# EAGLE board routed (EAGLE 7.7.0)
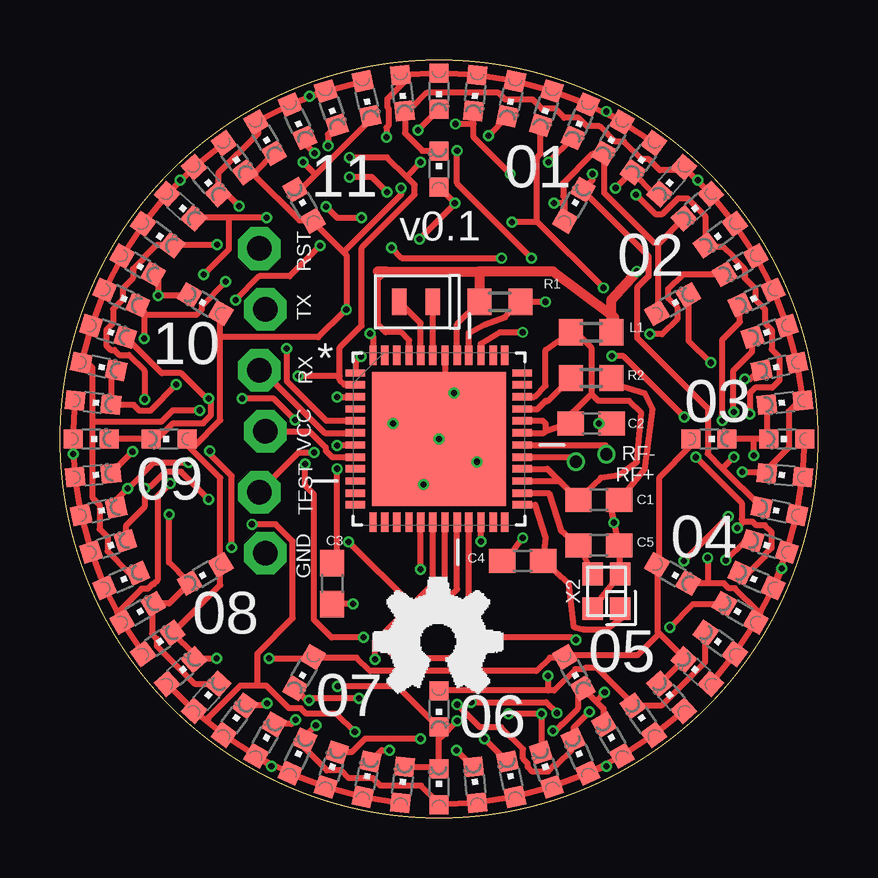
[diagram p0: board, top side]
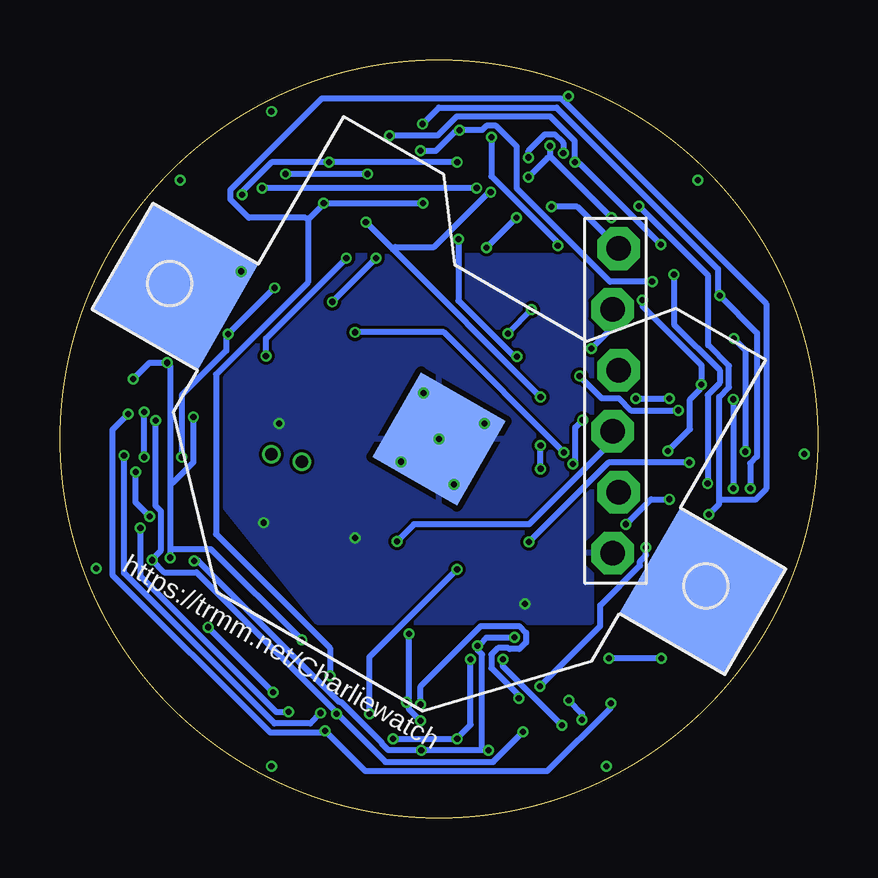
[diagram p1: board, bottom side, seen from below]

Size 31.6 x 31.6 mm. Coordinates in mm from the lower left corner, seen from the top.
Outline: circle at 15.8,15.8 radius 15.8
Copper layers (1*16): Top 0.035mm / dielectric 1.5mm / Bottom 0.035mm
Design rules "default *": minimum track width 10mil, minimum drill 10mil, track to track 5mil, track to pad 5mil, pad to pad 5mil, via to via 5mil, smd to smd 5mil, copper to edge 40mil, drill to drill 8mil, minimum pad ring 10mil, minimum via ring 4mil, stop-mask expansion 4mil, vias tented up to drill 15mil, thermal gap 10mil
Net classes: 0 default: width 0.102 mm, drill 0.025 mm, clearance 0.025 mm

## Footprints (pad centres in the part's own frame; a part is rotated, then mirrored left to right if it is on the bottom)
C0603 = smd 1.1 x 1: 1 -0.85,0; 2 0.85,0
1X06-BIGLOCK = drill 1.016 pad 1.778 octagon: 1 -6.35,0.127; 2 -3.81,-0.127; 3 -1.27,0.127; 4 1.27,-0.127; 5 3.81,0.127; 6 6.35,-0.127
R0603 = smd 1 x 1.1: 1 -0.85,0; 2 0.85,0
CHIPLED_0603 = smd 0.8 x 0.8: A 0,-0.75; C 0,0.75
QFN50P700X700X100-49N = smd 0.813 x 0.305: 1 -3.48,2.743; 2 -3.48,2.261; 3 -3.48,1.753; 4 -3.48,1.245; 5 -3.48,0.762; 6 -3.48,0.254; 7 -3.48,-0.254; 8 -3.48,-0.762; 9 -3.48,-1.245; 10 -3.48,-1.753; 11 -3.48,-2.261; 12 -3.48,-2.743; 25 3.48,-2.743; 26 3.48,-2.261; 27 3.48,-1.753; 28 3.48,-1.245; 29 3.48,-0.762; 30 3.48,-0.254; 31 3.48,0.254; 32 3.48,0.762; 33 3.48,1.245; 34 3.48,1.753; 35 3.48,2.261; 36 3.48,2.743 | smd 0.305 x 0.813: 13 -2.743,-3.48; 14 -2.261,-3.48; 15 -1.753,-3.48; 16 -1.245,-3.48; 17 -0.762,-3.48; 18 -0.254,-3.48; 19 0.254,-3.48; 20 0.762,-3.48; 21 1.245,-3.48; 22 1.753,-3.48; 23 2.261,-3.48; 24 2.743,-3.48; 37 2.743,3.48; 38 2.261,3.48; 39 1.753,3.48; 40 1.245,3.48; 41 0.762,3.48; 42 0.254,3.48; 43 -0.254,3.48; 44 -0.762,3.48; 45 -1.245,3.48; 46 -1.753,3.48; 47 -2.261,3.48; 48 -2.743,3.48 | smd 5.588 x 5.588: 49 0,0
CR2032-SMD = smd 5.08 x 5.08: +$1 -12.7,0; +$2 12.7,0 | smd 4.064 x 4.064: - 0,0
2.0X1.2-2PAD = smd 0.6 x 1.1: 1 -0.7,0; 2 0.7,0
FA-128 = smd 0.95 x 0.85: 1 -0.725,-0.575; 2 0.725,-0.575; 3 0.725,0.575; 4 -0.725,0.575

## Placement (x,y rotation side)
C1  [C0603]  22.47,13.26 0 top
C2  [C0603]  22.15,16.43 0 top
C3  [C0603]  11.35,9.77 270 top
C4  19pf  [C0603]  19.29,10.72 180 top
C5  19pf  [C0603]  22.47,11.35 0 top
JP1  [1X06-BIGLOCK]  8.43,17.39 90 bottom
L1  [R0603]  22.15,20.24 0 top
LED0  [CHIPLED_0603]  14.28,30.22 186 top
LED1  [CHIPLED_0603]  15.8,30.3 180 top
LED2  [CHIPLED_0603]  17.32,30.22 174 top
LED3  [CHIPLED_0603]  18.81,29.98 168 top
LED4  [CHIPLED_0603]  20.28,29.59 162 top
LED5  [CHIPLED_0603]  21.7,29.04 156 top
LED6  [CHIPLED_0603]  23.05,28.36 150 top
LED7  [CHIPLED_0603]  24.32,27.53 144 top
LED8  [CHIPLED_0603]  30.22,17.32 96 top
LED9  [CHIPLED_0603]  29.98,18.81 102 top
LED10  [CHIPLED_0603]  29.59,20.28 108 top
LED11  [CHIPLED_0603]  29.04,21.7 114 top
LED12  [CHIPLED_0603]  28.36,23.05 120 top
LED13  [CHIPLED_0603]  27.53,24.32 126 top
LED14  [CHIPLED_0603]  26.57,25.5 132 top
LED15  [CHIPLED_0603]  25.5,26.57 138 top
LED16  [CHIPLED_0603]  30.3,15.8 90 top
LED17  [CHIPLED_0603]  30.22,14.28 84 top
LED18  [CHIPLED_0603]  29.98,12.78 78 top
LED19  [CHIPLED_0603]  29.59,11.32 72 top
LED20  [CHIPLED_0603]  29.04,9.9 66 top
LED21  [CHIPLED_0603]  28.36,8.55 60 top
LED22  [CHIPLED_0603]  27.53,7.28 54 top
LED23  [CHIPLED_0603]  26.57,6.1 48 top
LED24  [CHIPLED_0603]  15.8,1.3 0 top
LED25  [CHIPLED_0603]  17.32,1.38 6 top
LED26  [CHIPLED_0603]  18.81,1.62 12 top
LED27  [CHIPLED_0603]  20.28,2.01 18 top
LED28  [CHIPLED_0603]  21.7,2.55 24 top
LED29  [CHIPLED_0603]  23.05,3.24 30 top
LED30  [CHIPLED_0603]  24.32,4.07 36 top
LED31  [CHIPLED_0603]  25.5,5.02 42 top
LED32  [CHIPLED_0603]  14.28,1.38 354 top
LED33  [CHIPLED_0603]  12.78,1.62 348 top
LED34  [CHIPLED_0603]  11.32,2.01 342 top
LED35  [CHIPLED_0603]  9.9,2.55 336 top
LED36  [CHIPLED_0603]  8.55,3.24 330 top
LED37  [CHIPLED_0603]  7.28,4.07 324 top
LED38  [CHIPLED_0603]  6.1,5.02 318 top
LED39  [CHIPLED_0603]  5.02,6.1 312 top
LED40  [CHIPLED_0603]  1.38,17.32 264 top
LED41  [CHIPLED_0603]  1.3,15.8 270 top
LED42  [CHIPLED_0603]  1.38,14.28 276 top
LED43  [CHIPLED_0603]  1.62,12.78 282 top
LED44  [CHIPLED_0603]  2.01,11.32 288 top
LED45  [CHIPLED_0603]  2.55,9.9 294 top
LED46  [CHIPLED_0603]  3.24,8.55 300 top
LED47  [CHIPLED_0603]  4.07,7.28 306 top
LED48  [CHIPLED_0603]  1.62,18.81 258 top
LED49  [CHIPLED_0603]  2.01,20.28 252 top
LED50  [CHIPLED_0603]  2.55,21.7 246 top
LED51  [CHIPLED_0603]  3.24,23.05 240 top
LED52  [CHIPLED_0603]  4.07,24.32 234 top
LED53  [CHIPLED_0603]  5.02,25.5 228 top
LED54  [CHIPLED_0603]  6.1,26.57 222 top
LED55  [CHIPLED_0603]  7.28,27.53 216 top
LED56  [CHIPLED_0603]  15.8,4.55 180 top
LED57  [CHIPLED_0603]  15.8,27.05 0 top
LED58  [CHIPLED_0603]  25.54,21.42 300 top
LED59  [CHIPLED_0603]  21.42,25.54 330 top
LED60  [CHIPLED_0603]  12.78,29.98 192 top
LED61  [CHIPLED_0603]  11.32,29.59 198 top
LED62  [CHIPLED_0603]  9.9,29.04 204 top
LED63  [CHIPLED_0603]  8.55,28.36 210 top
LED64  [CHIPLED_0603]  27.05,15.8 270 top
LED65  [CHIPLED_0603]  4.55,15.8 90 top
LED66  [CHIPLED_0603]  25.54,10.17 240 top
LED67  [CHIPLED_0603]  6.06,21.42 60 top
LED68  [CHIPLED_0603]  10.17,25.54 30 top
LED69  [CHIPLED_0603]  10.17,6.06 150 top
LED70  [CHIPLED_0603]  21.42,6.06 210 top
LED71  [CHIPLED_0603]  6.06,10.17 120 top
R1  75k  [R0603]  18.34,21.51 180 top
R2  56k  [R0603]  22.15,18.34 180 top
U2  CC430F5137IRGZR  [QFN50P700X700X100-49N]  15.8,15.8 0 top
U$1  [CR2032-SMD]  15.8,15.8 330 bottom
X1  CRYSTALS-NOGND-IQXC-25  [2.0X1.2-2PAD]  14.85,21.51 180 top
X2  FA-128  [FA-128]  22.78,9.45 90 top

## Library data of the parts
C1-C5 = resistor
JP1 U$1 = adafruit
L1 R1 R2 = rcl
LED0 LED1-LED71 = led
U2 = Texas Instruments_By_element14_Batch_1; MPN: CC430F5137IRGZR; OC_FARNELL: -; OC_NEWARK: 68R5912; PACKAGE: QFN-48; SUPPLIER: TEXAS INSTRUMENTS
X1 = IQD-Frequency-Products
X2 = crystals

## Nets
AVCC: C1.1 C2.1 L1.1 U2.27 U2.28 U2.31 U2.32 U2.34
B0: LED0.A LED1.A LED2.A LED3.A LED4.A LED5.A LED6.A LED7.A LED8.C LED16.C LED24.C LED32.C LED40.C LED48.C LED56.C LED64.C U2.21
B1: LED0.C LED8.A LED9.A LED10.A LED11.A LED12.A LED13.A LED14.A LED15.A LED17.C LED25.C LED33.C LED41.C LED49.C LED57.C LED65.C U2.20
B2: LED1.C LED9.C LED16.A LED17.A LED18.A LED19.A LED20.A LED21.A LED22.A LED23.A LED26.C LED34.C LED42.C LED50.C LED58.C LED66.C U2.19
B3: LED2.C LED10.C LED18.C LED24.A LED25.A LED26.A LED27.A LED28.A LED29.A LED30.A LED31.A LED35.C LED43.C LED51.C LED59.C LED67.C U2.18
B4: LED3.C LED11.C LED19.C LED27.C LED32.A LED33.A LED34.A LED35.A LED36.A LED37.A LED38.A LED39.A LED44.C LED52.C LED60.C LED68.C U2.17
B5: LED4.C LED12.C LED20.C LED28.C LED36.C LED40.A LED41.A LED42.A LED43.A LED44.A LED45.A LED46.A LED47.A LED53.C LED61.C LED69.C U2.3
B6: LED5.C LED13.C LED21.C LED29.C LED37.C LED45.C LED48.A LED49.A LED50.A LED51.A LED52.A LED53.A LED54.A LED55.A LED62.C LED70.C U2.2
B7: LED6.C LED14.C LED22.C LED30.C LED38.C LED46.C LED54.C LED56.A LED57.A LED58.A LED59.A LED60.A LED61.A LED62.A LED63.A LED71.C U2.1
B8: LED7.C LED15.C LED23.C LED31.C LED39.C LED47.C LED55.C LED63.C LED64.A LED65.A LED66.A LED67.A LED68.A LED69.A LED70.A LED71.A U2.48
BSL_RST: JP1.6 R1.1 U2.40
BSL_RX: JP1.4 U2.6
BSL_TEST: JP1.2 U2.39
BSL_TX: JP1.5 U2.5
BSL_VCC: JP1.3 U2.8 U2.22
GND: C1.2 C2.2 C3.2 C4.2 C5.2 JP1.1 R2.1 U2.42 U2.49 U$1.- X2.2 X2.4
P2.4: U2.47
P3.5: U2.16
P3.6: U2.15
P3.7: U2.14
R_BIAS: R2.2 U2.33
RF_N: U2.30
RF_P: U2.29
RF_XIN: C4.1 U2.25 X2.1
RF_XOUT: C5.1 U2.26 X2.3
VCC: L1.2 R1.2 U2.41 U2.45 U$1.+$1
VCORE: C3.1 U2.7
XIN: U2.44 X1.2
XOUT: U2.43 X1.1

## Tracks (layer width: path | path; a pad name or v marks a point on that pad's centre or on a via)
AVCC
  Top 0.254: U2.32 20.12,16.56 20.24,16.43 20.24,16.12 | U2.31 20.18,16.05 20.24,16.12 | U2.34 19.77,17.55 20.24,18.02 20.24,19.51 L1.1 21.51,20.24 22.15,19.61 22.15,17.68 | C2.1 20.74,16.26 | 20.74,16.26 20.24,16.12 | 22.15,17.68 20.74,16.26 | 22.15,17.68 22.44,17.39 23.74,17.39 24.23,16.89 24.05,14.85 23.28,14.27 22.54,14.17 21.59,13.28 C1.1 20.83,14.05 | U2.27 20.83,14.05 | U2.28 20.32,14.55 20.83,14.05
B0  (via drill 0.25)
  Top 0.254: LED7.A LED6.A | LED6.A LED5.A LED4.A LED3.A LED2.A LED1.A LED0.A 14.53,30.86 13.64,29.97 13.64,29.64 13.69,29.59 13.69,28.85 13.61,28.78 v13.61,28.37 | 17.07,12.29 U2.21 v17.04,7.67 | v22.78,29.45 LED6.A | LED48.C 2.34,18.64 2.13,18.44 LED40.C 2.26,17.22 3.07,17.22 3.33,16.97 3.76,16.97 v4.85,18.06 | v7.31,21.59 8.31,22.58 9.58,22.58 v10.85,23.85 | 28.93,15.8 LED16.C 29.49,15.9 29.49,17.22 LED8.C | 28.93,15.8 LED64.C | LED32.C 14.38,2.11 15.75,2.11 LED24.C 15.8,3.38 | 15.8,3.38 LED56.C 15.7,3.86 14.07,5.49 v11.58,5.49 | v16.56,4.04 15.9,3.38 15.8,3.38 | v28.93,15.11 28.93,15.8 | v20.73,4.37 20.27,4.83 v17.14,4.83 | v6.25,15.29 6.25,15.16 7.16,14.25 v7.16,11.28
  Bottom 0.254: v7.31,21.59 7.31,21.34 4.85,18.87 v4.85,18.06 4.93,17.96 4.93,17.86 5.33,17.45 5.33,16.2 v6.25,15.29 | v10.85,23.85 10.85,23.98 13.61,26.75 v13.61,28.37 | 17.04,4.83 17.04,4.52 v16.56,4.04 | 17.04,4.83 v17.04,7.67 | v28.93,15.11 28.93,10.21 22.66,3.94 21.16,3.94 v20.73,4.37 | v17.14,4.83 17.04,4.83 | v7.16,11.28 7.16,10.95 7.42,10.69 7.42,10.52 9.07,8.86 9.07,8 v11.58,5.49
B1  (via drill 0.25)
  Top 0.254: LED14.A LED13.A LED12.A LED11.A LED10.A LED9.A LED8.A 30.84,17.4 30.38,16.94 30.38,15.44 29.49,14.55 29.49,14.38 LED17.C 29.36,14.43 v28.45,14.43 | LED14.A LED15.A 25.96,27 25.02,27 24.56,27.46 24.26,27.46 23.52,28.19 23.14,28.19 22.5,28.83 21.97,28.83 21.62,29.18 21.03,29.18 20.65,29.57 20.09,29.57 19.71,29.95 18.57,29.95 18.29,30.23 15.29,30.23 14.6,29.54 14.48,29.54 LED0.C 14.38,29.46 14.38,28.55 15.11,27.81 15.8,27.81 LED57.C | v26.59,26.59 LED14.A | LED41.C LED65.C 3.91,15.85 4.11,15.85 4.72,16.46 5.97,16.46 6.3,16.79 6.3,17.3 6.16,17.44 | 6.16,17.44 5.05,18.54 4.24,18.54 2.74,20.04 LED49.C | v16.54,2.82 17.22,2.13 LED25.C | v13.74,2.82 13.41,2.82 12.95,2.36 LED33.C | U2.20 16.56,9.52 v14.2,7.16 | v7.59,17.47 8.92,17.47 v9.8,16.59 | v10.21,14.76 10.21,13.87 10.59,13.49 10.59,8.25 11.33,7.52 v12.65,7.52 | v6.2,17.47 6.16,17.44 | v26.01,10.72 v27.86,12.57
  Bottom 0.254: v13.74,2.82 14,2.82 | 14,2.82 v16.54,2.82 17.91,2.82 18.19,3.1 18.19,3.15 19.86,4.83 19.94,4.83 25.83,10.72 v26.01,10.72 | 14,2.82 14,6.81 14.2,7.01 v14.2,7.16 14.1,7.24 13.82,7.52 v12.65,7.52 | v7.59,17.47 v6.2,17.47 | v9.8,16.59 10.11,16.28 10.11,14.86 v10.21,14.76 | v28.45,14.43 28.45,13.16 v27.86,12.57
B2  (via drill 0.25)
  Top 0.254: LED23.A LED22.A LED21.A 29.2,8.56 | 29.2,8.56 LED20.A | LED20.A LED19.A LED18.A 30.85,13.51 LED17.A LED16.A | v30.09,10.4 LED20.A | v3.02,15.27 2.13,14.38 LED42.C | 3.5,20.98 3.5,21.13 3.25,21.39 LED50.C | 3.5,20.98 v3.5,19.99 | v14.93,28.68 LED1.C | v6.91,22.35 5.92,21.36 5.92,21.21 5.69,20.98 3.5,20.98 | 27,9.78 27.69,9.78 27.89,9.58 28.14,9.58 29.11,8.61 29.2,8.56 | 27,9.78 26.21,9.78 LED66.C | v27.13,18.97 26.21,19.89 26.21,21.79 LED58.C | v28.55,18.29 28.78,18.29 29.13,18.64 29.24,18.64 LED9.C | v27,10.85 27,9.78 | v15.04,3.3 12.73,3.3 12.17,2.74 11.56,2.74 LED34.C | v17.7,3.3 18.64,2.36 LED26.C | U2.19 16.05,9.7 13.72,7.37 13.72,6.96 14.07,6.6 v14.48,6.6 14.58,6.68 16.74,6.68 17.6,7.54 21.31,7.54 21.44,7.42 v21.51,7.42 | v16.56,27.81 16.56,26.44 v19.66,23.34 | v23.01,19.25 23.49,19.25 v26.03,16.71
  Bottom 0.254: v3.02,15.27 3.02,19.51 v3.5,19.99 | v6.91,22.35 8.66,22.35 12.55,26.24 12.55,27.99 13.41,28.85 13.82,28.85 14,28.68 v14.93,28.68 15.04,28.6 15.14,28.6 15.93,27.81 v16.56,27.81 | v28.55,18.29 27.86,18.97 v27.13,18.97 27.05,18.87 27,18.82 27,13.97 | 27,13.97 27,11.2 | 27,11.2 v27,10.85 | v17.7,3.3 v15.04,3.3 14.96,3.4 14.48,3.89 v14.48,6.6 | 27,11.2 25.3,11.2 v21.51,7.42 | v19.66,23.34 23.01,19.99 v23.01,19.25 | v26.03,16.71 26.03,14.83 26.9,13.97 27,13.97
B3  (via drill 0.25)
  Top 0.254: LED28.A LED27.A LED26.A LED25.A LED24.A 15.75,0.66 15.06,1.35 13.36,1.35 13.06,1.65 12.04,1.65 11.71,1.98 11.12,1.98 10.21,2.9 10.21,3.23 LED35.C 10.16,3.35 v10.67,3.86 | LED31.A LED30.A LED29.A LED28.A | v22.78,2.15 LED28.A | U2.18 15.54,9.75 14.67,8.88 | 14.67,8.88 13.13,7.34 v13.13,6.6 | LED43.C 2.36,12.95 2.36,13.28 v2.82,13.74 2.92,13.82 3.91,14.81 v5.36,14.81 | LED51.C 3.91,22.66 4.09,22.48 v4.09,21.77 4.19,21.79 5.38,21.79 LED67.C | 17.25,28.93 17.25,28.37 v18.77,26.85 | 17.25,28.93 LED2.C | v22.2,26.85 22.2,26.59 21.82,26.21 LED59.C 21.87,26.09 24.54,23.42 24.54,22.58 24.05,22.1 24.05,20.01 27,17.07 27,15.19 27.62,14.57 | 27.62,14.57 29.24,12.95 LED18.C | v28.09,16.92 28.07,16.94 28.07,18.64 28.85,19.43 28.85,20.04 LED10.C | 27.62,14.57 v28.09,15.04 | 17.25,28.93 v16.48,28.93 | v12.04,11.51 14.67,8.88
  Bottom 0.254: v13.13,6.6 13.13,6.32 v10.67,3.86 | v2.82,13.74 2.82,14.78 2.54,15.06 2.54,20.22 v4.09,21.77 4.17,21.87 4.17,22.89 10.9,29.62 15.8,29.62 v16.48,28.93 | v22.2,26.85 v18.77,26.85 | v28.09,15.04 v28.09,16.92 | v12.04,11.51 8.74,14.81 v5.36,14.81
B4  (via drill 0.25)
  Top 0.254: 6.12,4.04 LED38.A LED39.A | 6.12,4.04 LED37.A LED36.A | LED36.A LED35.A LED34.A LED33.A LED32.A | LED36.A v8.81,2.15 | 10.65,26.81 12.93,29.08 12.93,29.24 LED60.C | 10.65,26.81 10.06,26.21 9.8,26.21 LED68.C | v17.86,28.45 18.64,29.24 LED3.C | 10.65,26.81 v10.13,27.33 | v3.53,17.45 3.53,18.64 2.87,19.3 2.46,19.3 2.26,19.51 2.11,19.51 1.93,19.68 1.93,20.35 2.21,20.62 2.21,21.21 2.62,21.62 2.62,22.07 3.05,22.5 3.05,22.89 3.53,23.37 3.53,23.39 4.01,23.88 LED52.C 4.8,23.9 v6.55,23.9 | LED44.C 2.74,11.56 2.74,12.17 3.53,12.95 v3.53,13.74 3.63,13.82 3.78,13.82 4.39,14.43 5.05,14.43 v6.2,13.28 | v27.76,10.74 28.55,11.53 28.85,11.53 LED19.C | LED27.C 20.07,2.74 v20.07,4.34 v18.69,4.34 | v27.61,16.56 27.61,19.94 28.35,20.68 28.35,21.39 LED11.C | v15.04,10.36 U2.17 | 8.23,5.51 8.61,5.51 9.55,4.57 10.03,4.57 10.26,4.34 11.53,4.34 v12.29,3.58 | 8.23,5.51 7.52,5.51 6.2,4.19 6.2,4.14 6.12,4.04 | v8,12.24 8.99,12.24 9.7,11.53 9.7,8.33 8.23,6.86 8.23,5.51
  Bottom 0.254: v17.86,28.45 15.85,28.45 15.06,29.24 11.15,29.24 10.13,28.22 v10.13,27.33 10.03,27.25 9.91,27.25 v6.55,23.9 | v3.53,17.45 v3.53,13.74 | v27.61,16.56 27.61,13 27.38,12.78 27.38,11.15 27.69,10.85 v27.76,10.74 27.25,10.24 25.91,10.24 20.07,4.39 v20.07,4.34 19.96,4.27 18.03,2.34 13.54,2.34 v12.29,3.58 | v15.04,10.36 18.69,6.71 v18.69,4.34 | v6.2,13.28 6.96,13.28 v8,12.24
B5  (via drill 0.25)
  Top 0.254: LED41.A LED42.A LED43.A LED44.A LED45.A 2.38,8.58 | LED41.A LED40.A | 2.38,8.58 LED46.A LED47.A | LED41.A v0.56,15.16 | v9.83,4.09 9.65,3.91 8.94,3.91 LED36.C | LED69.C 9.8,5.38 10.29,4.9 v10.39,4.9 10.49,4.98 v12.47,4.98 | v22.07,4.42 21.41,3.76 21.41,3.25 LED28.C 21.34,3.12 21.34,2.84 20.7,2.21 20.62,2.21 20.35,1.93 19.68,1.93 19.51,2.11 19.51,2.26 19.3,2.46 19.3,2.87 18.39,3.78 17.5,3.78 v16.56,4.72 | 28.5,12.34 v28.24,12.09 | 28.5,12.34 28.88,12.34 29.03,12.19 29.39,12.19 29.67,11.91 29.67,11.25 29.39,10.97 29.39,10.9 28.7,10.21 28.37,10.21 LED20.C | v8.61,25.02 7.04,25.02 | 7.04,25.02 5.59,25.02 LED53.C | v11.18,28.02 11.18,28.5 11.53,28.85 LED61.C | 19.89,24.87 19.89,27.53 20.04,27.69 20.04,28.85 LED4.C | v22.66,22.1 19.89,24.87 | v24.59,20.17 25.09,20.17 25.73,20.8 25.73,21.28 25.35,21.67 25.35,22.05 25.96,22.66 27.69,22.66 LED12.C | v11.56,17.55 U2.3 | v18.85,24.84 19.79,24.84 19.89,24.87 | v12.06,26.72 13,26.72 v13.64,26.09 | v4.6,13.94 4.06,13.41 4.06,9.91 3.91,9.75 3.86,9.75 3.66,9.55 3.4,9.55 2.49,8.64 2.38,8.58 | v5.99,22.66 7.04,23.7 7.04,25.02 | v26.52,15.04 28.42,13.13 28.42,12.45 28.5,12.34
  Bottom 0.254: v9.83,4.09 9.83,4.34 v10.39,4.9 | v22.07,4.42 22.58,4.42 28.24,10.08 v28.24,12.09 | v12.47,4.98 12.47,5.11 13.61,6.25 13.61,6.81 13.33,7.09 12.9,7.09 12.85,7.04 12.45,7.04 12.17,7.31 12.17,7.72 12.45,8 14.05,8 16.56,5.49 v16.56,4.72 | 11.18,27.58 v8.61,25.02 | v11.18,28.02 11.18,27.58 | v22.66,22.1 v24.59,20.17 24.66,20.07 24.66,19.48 26.52,17.63 v26.52,15.04 | v18.85,24.84 17.72,23.71 | 17.72,23.71 v11.56,17.55 | v12.06,26.72 11.28,27.51 11.18,27.58 | v13.64,26.09 13.72,26.09 16,23.8 17.63,23.8 17.72,23.71 | v4.6,13.94 4.6,17.63 4.09,18.14 4.09,18.67 5.99,20.57 v5.99,22.66
B6  (via drill 0.25)
  Top 0.254: LED55.A LED54.A | LED54.A LED53.A LED52.A LED51.A LED50.A LED49.A LED48.A 1.04,19.08 1.35,18.77 1.35,16.51 | LED54.A v5,26.59 | v8.64,4.77 8.56,4.7 7.72,4.7 LED37.C | v20.55,3.63 20.65,3.63 20.9,3.89 20.93,3.89 21.59,4.55 21.59,5.18 21.79,5.38 LED70.C 21.89,5.31 22.34,4.86 | 22.34,4.86 22.66,4.55 22.66,3.91 LED29.C | v25.43,7.95 26.39,8.92 27.69,8.92 LED21.C | 22.34,4.86 v22.71,5.23 | 1.35,16.51 1.35,13.36 1.65,13.06 1.65,12.04 1.98,11.71 1.98,11.12 2.9,10.21 3.23,10.21 LED45.C | v10.62,27.71 10.21,28.12 10.21,28.35 LED62.C | v12.06,27.53 13.64,27.53 14.44,26.73 | 14.44,26.73 14.78,26.39 14.78,25.98 12.57,23.77 12.57,20.52 11.66,19.61 11.66,18.41 | 11.66,18.41 11.66,18.26 11.86,18.06 U2.2 | v20.37,27.33 21.39,28.35 LED5.C | 14.44,26.73 v15.04,27.33 | v24,25.98 24.82,25.17 25.12,25.17 25.78,25.83 26.16,25.83 26.9,25.09 26.9,23.9 LED13.C 27.03,23.82 27.63,23.82 28.07,23.39 28.07,23.37 28.55,22.89 28.55,22.5 28.98,22.07 28.98,21.62 29.39,21.21 29.39,20.62 29.67,20.35 29.67,19.53 30,19.2 30,18.24 29.69,17.93 28.98,17.93 28.75,17.7 v28.75,16.84 | 1.35,16.51 4.22,16.51 4.7,16.99 v5.82,16.99 | 11.66,18.41 v9.93,18.41
  Bottom 0.254: v8.64,4.77 8.64,4.6 11.28,1.96 18.87,1.96 v20.55,3.63 20.65,3.56 22.83,3.56 29.41,10.13 29.41,16.18 v28.75,16.84 | v22.71,5.23 v25.43,7.95 | v10.62,27.71 10.62,28.14 10.97,28.5 11.38,28.5 12.06,27.81 v12.06,27.53 | v15.04,27.33 v20.37,27.33 22.78,27.33 24,26.11 v24,25.98 | v5.82,16.99 7.8,16.99 8.31,17.5 9.02,17.5 v9.93,18.41
B7  (via drill 0.25)
  Top 0.254: LED61.A LED60.A | LED61.A LED62.A LED63.A 8.25,28.9 8.25,28.52 6.6,26.87 6.6,26.03 LED54.C 6.71,25.96 7.01,25.96 v7.47,25.5 | LED61.A v10.4,30.09 | LED38.C 6.58,5.59 5.61,5.59 4.04,7.16 4.04,7.47 3.84,7.67 3.84,8.81 LED46.C 3.91,8.94 4.55,8.94 5.38,9.78 LED71.C 5.31,9.88 4.55,10.64 v4.55,12.65 | 20.35,5.31 20.6,5.31 21.49,6.2 21.84,6.2 21.89,6.25 22.38,6.25 23.88,4.75 23.88,4.7 LED30.C 24,4.7 25.09,4.7 26.9,6.5 26.9,7.7 LED22.C | 20.35,5.31 LED56.A | 24.92,23.9 24.92,21.06 LED58.A | 24.92,23.9 LED14.C | 21.03,25.63 21.03,25.88 20.98,25.93 20.98,26.47 22.2,27.69 22.66,27.69 LED6.C 22.68,27.58 22.68,26.06 24.76,23.98 24.82,23.98 24.92,23.9 | 21.03,25.63 21.03,24.92 LED59.A | 21.03,25.63 v20.6,25.63 | LED57.A v16.46,25.63 16.38,25.53 v14.99,24.13 | U2.1 12.32,19 v12.55,19.23 | v20.35,5.92 20.35,5.31
  Bottom 0.254: v7.47,25.5 4.57,22.61 4.57,19.71 3.71,18.85 3.71,17.96 4.11,17.55 4.11,13.26 | 4.11,13.26 4.11,13.08 v4.55,12.65 | v16.46,25.63 v20.6,25.63 20.68,25.53 21.26,24.94 | v12.55,19.23 12.65,19.23 14.99,21.56 v14.99,24.13 | v20.35,5.92 20.35,7.09 25.09,11.84 25.09,18.49 21.26,22.33 21.26,24.94 | 4.11,13.26 2.62,13.26 2.16,13.72 2.16,21.44 10.72,30 20.68,30 24.49,26.19 24.49,25.78 23.72,25.02 21.36,25.02 21.26,24.94
B8  (via drill 0.25)
  Top 0.254: LED31.C 25.02,5.59 26.01,6.58 LED23.C 25.96,6.71 24.98,7.68 | 24.98,7.68 24.92,7.75 24.92,10.54 LED66.A 24.99,10.64 24.99,14.2 26.29,15.49 LED64.A | 24.98,7.68 24.08,6.78 21.16,6.78 LED70.A 21.03,6.68 20.42,6.68 19.86,6.12 12.93,6.12 12.37,6.68 10.57,6.68 LED69.A 10.44,6.65 v8.71,6.65 | 6.68,20.04 6.68,16.59 5.56,15.47 LED65.A 5.31,15.54 6.68,14.17 6.68,10.67 LED71.A 6.68,10.54 6.68,9.7 4.77,7.8 LED47.C 4.7,7.7 5.56,6.83 5.56,6.6 LED39.C 5.69,6.65 v6.53,6.65 | 6.68,20.04 6.68,21.03 LED67.A | LED15.C 24.99,26.03 24.76,26.03 23.9,26.9 LED7.C 23.77,26.87 v23.16,26.26 | LED63.C 8.92,27.69 8.15,26.92 LED55.C 8.08,26.82 9.98,24.92 10.54,24.92 LED68.A 10.62,24.79 11.82,23.58 | U2.48 13.06,20.07 v12.93,20.19 | 11.82,23.58 11.94,23.47 v11.94,21.18 11.84,21.11 10.77,20.04 6.68,20.04 | v14.22,26.26 14.22,25.98 11.82,23.58
  Bottom 0.254: v11.94,21.18 v12.93,20.19 | v14.22,26.26 v23.16,26.26 | v6.53,6.65 v8.71,6.65
BSL_RST  (via drill 0.25)
  Top 0.254: U2.40 17.04,20.22 17.7,20.56 18.55,20.88 R1.1 v20.24,21.51 | v18.41,23.34 14.25,23.34 v13.82,23.77 | v12.57,25.02 11.56,25.02 v11.1,25.48
  Bottom 0.254: v18.41,23.34 v20.24,21.51 | v12.57,25.02 v13.82,23.77 | v11.1,25.48 10.03,25.48 JP1.6
BSL_RX
  Top 0.254: U2.6 11.02,16.05 8.43,18.64 8.31,18.64 JP1.4
BSL_TEST  (via drill 0.25)
  Top 0.254: U2.39 17.55,19.77 18.34,20.24 v19.29,20.24 | v10.59,15.24 9.96,15.24 JP1.2
  Bottom 0.254: v19.29,20.24 15.6,20.24 v10.59,15.24
BSL_TX  (via drill 0.25)
  Top 0.254: U2.5 11.1,16.56 9.45,18.21 v9.45,19.56
  Bottom 0.254: v9.45,19.56 8.56,20.45 JP1.5
BSL_VCC  (via drill 0.25)
  Top 0.254: U2.8 11.35,15.04 11.07,15.32 11.07,15.44 10.41,16.1 8.56,16.1 JP1.3 | v17.55,11.53 U2.22
  Bottom 0.254: v17.55,11.53 16.84,12.24 12.04,12.24 8.56,15.72 JP1.3
GND  (via drill 0.25)
  Top 0.254: U2.42 16.05,17.77 U$1.- | R2.1 23,18.12 | C2.2 23,16.54 | 23,12.84 C5.2 X2.2 X2.4 | 23,12.84 v23.1,12.31 | 23,12.84 C1.2 24.37,14.53 24.69,17.07 24.37,17.7 23,18.12 | C4.2 18.44,10.5 v19.29,11.67 | 23,18.12 23.2,18.12 | 23,16.65 23,16.54 | 23,16.54 v22.47,16.43 | v13.89,16.43 U$1.- | v15.16,13.89 U$1.- | v16.43,17.7 U$1.- | v17.39,14.85 U$1.- | v12.22,8.92 C3.2 | C3.2
  Top 0.61: U$1.- 13.89,13.89 13.89,13.58
  other vias: 15.8,15.8
  pour Bottom: 9.45,23.42 20.88,23.42 24.69,18.34 24.69,12.94 20.88,8.18 9.45,8.18
R_BIAS
  Top 0.254: U2.33 19.9,17.04 20.24,17.39 20.35,17.39 R2.2
RF_N  (via drill 0.51)
  Top 0.254: U2.30 22.72,15.54 arc-90 v22.78,15.16
RF_P  (via drill 0.51)
  Top 0.254: U2.29 21.32,15.04 arc-90 v21.51,14.85
RF_XIN
  Top 0.254: U2.25 19.81,13.06 20.24,11.67 C4.1 21.2,9.77 21.41,7.96 21.83,7.86 22.78,7.86 23.42,8.35 X2.1
RF_XOUT
  Top 0.254: U2.26 20.38,13.54 20.88,11.99 C5.1 X2.3
VCC  (via drill 0.25)
  Top 0.254: U2.41 16.56,20.59 R1.2 | U2.45 14.55,19.9 14.21,20.24 13.58,20.24 13.26,20.56 13.26,22.47 13.58,22.78 | 23.1,20.35 L1.2 | 23,20.95 23.01,20.95
  Top 0.406: 17.49,22.78 13.58,22.78 13.26,22.78 | 17.49,22.78 R1.2 | L1.2 23,20.95 23,21.62 v24.05,22.78 | 23.1,20.88 23.01,20.95 20.56,22.78 17.49,22.78
  Bottom 0.254: v24.05,22.78 26.16,22.78 U$1.+$1
VCORE  (via drill 0.25)
  Top 0.254: U2.7 11.58,15.54 v11.56,15.52 | v11.56,14.55 11.56,10.82 C3.1 | C3.1
  Bottom 0.254: v11.56,14.55 v11.56,15.52
XIN
  Top 0.254: U2.44 15.04,20.62 X1.2
XOUT
  Top 0.254: U2.43 X1.1

## Text on the board
tNames: 01 | 11 | v0.1 | RST | 02 | TX | 10 | RX | 03 | VCC | RF- | RF+ | 09 | TEST | GND | 04 | 08 | 05 | 07 | 06
bNames: https://trmm.net/Charliewatch